# EAGLE board H04 (EAGLE 6.6.0)
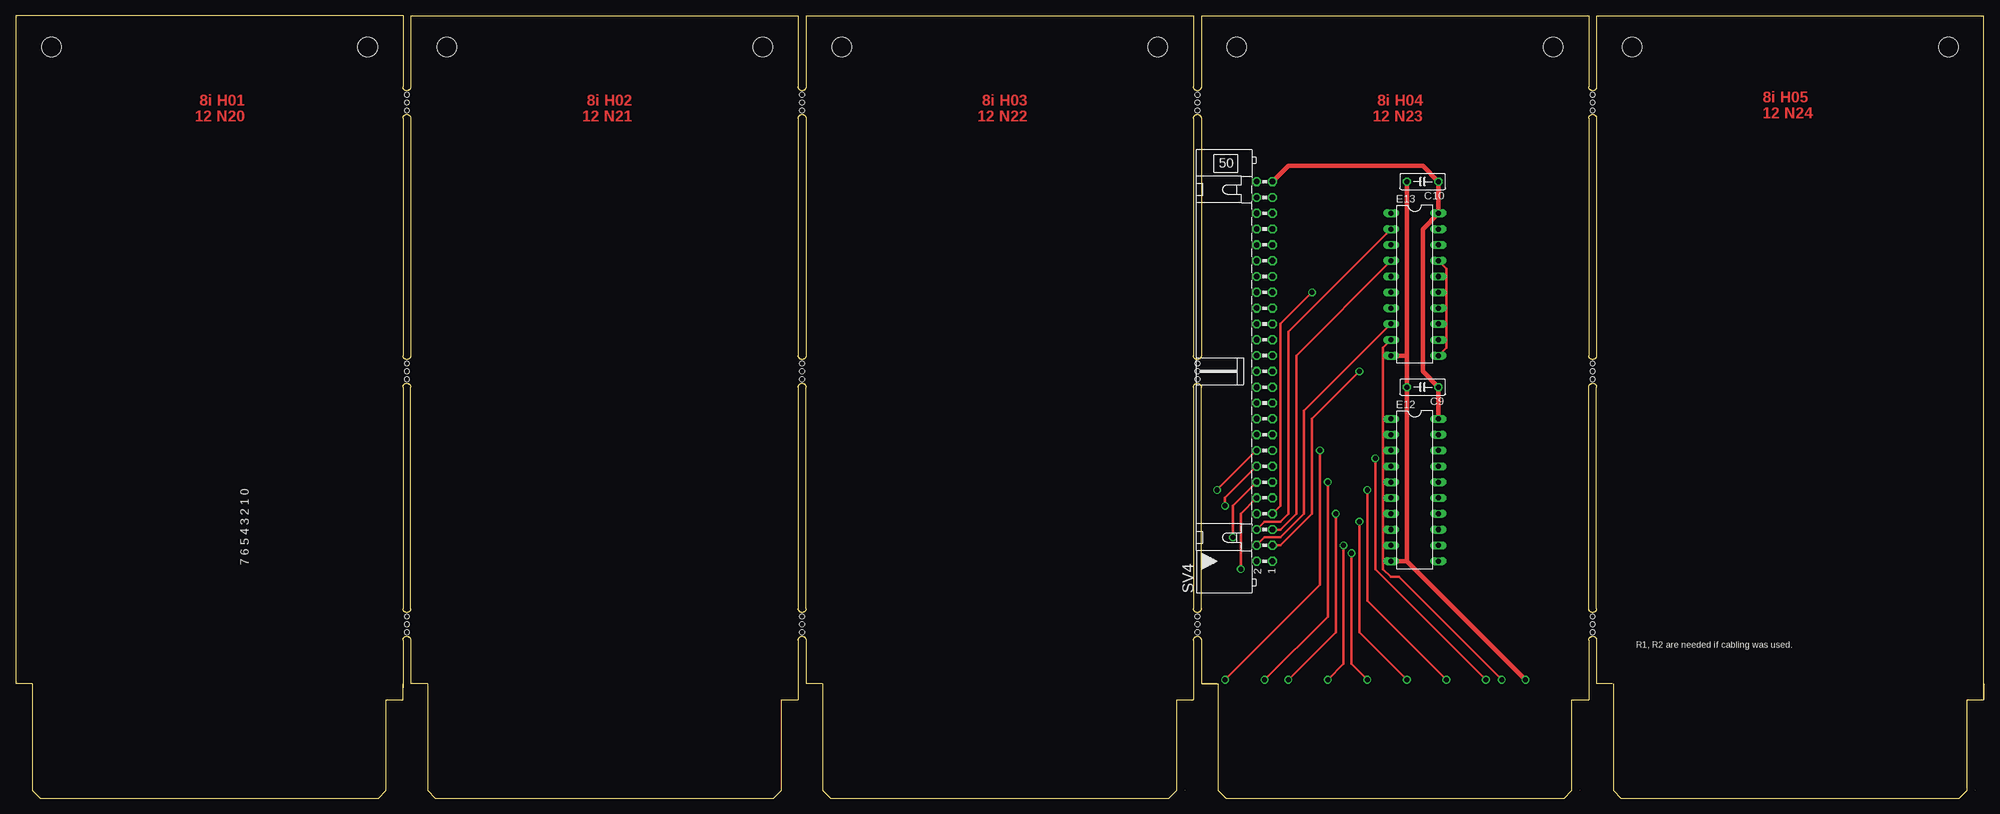
[diagram p0: board, top side]
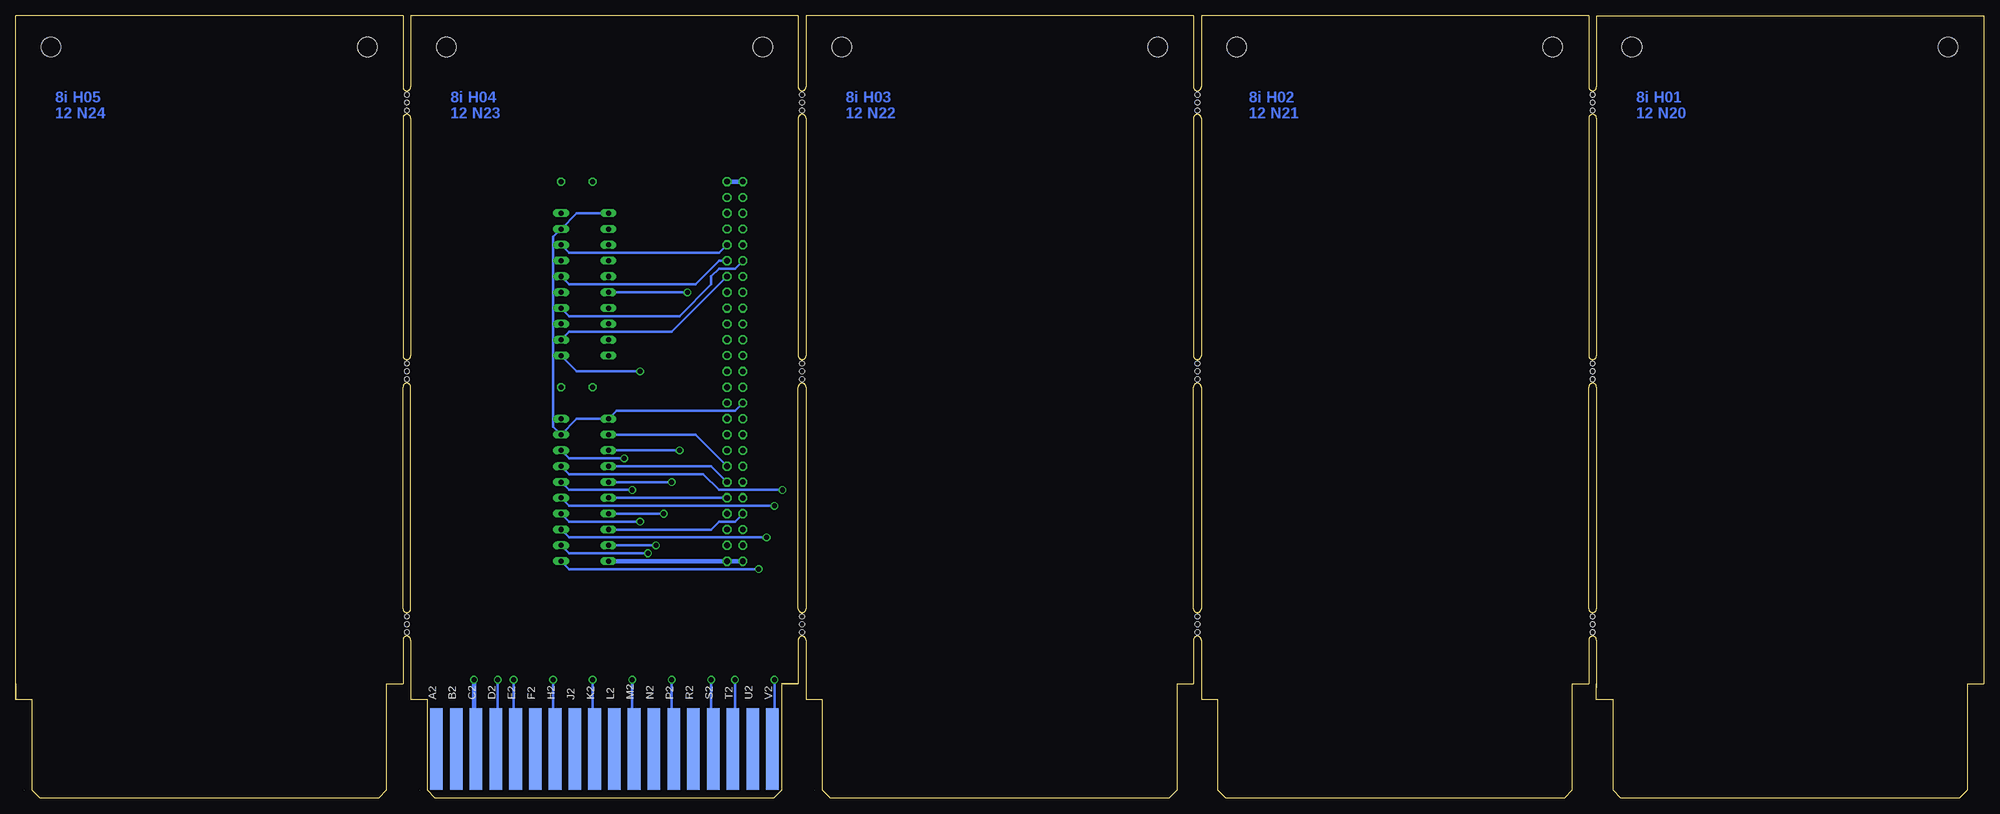
[diagram p1: board, bottom side, seen from below]

Size 316.23 x 125.73 mm. Coordinates in mm from the lower left corner, seen from the top.
Copper layers (1+16): Top 0.035mm / dielectric 1.5mm / Bottom 0.035mm
Design rules "16mils": minimum track width 16mil, minimum drill 32mil, track to track 15mil, track to pad 10mil, pad to pad 10mil, via to via 10mil, smd to smd 10mil, copper to edge 13mil, drill to drill 10mil, minimum pad ring 10mil, minimum via ring 8mil, stop-mask expansion 0mil, vias tented up to drill 0mil, thermal gap 10mil
Net classes: 1 supply: width 0.711 mm

## Footprints (pad centres in the part's own frame; a part is rotated, then mirrored left to right if it is on the bottom)
C050-025X075 = drill 0.813 octagon: 1 -2.54,0; 2 2.54,0
DIL20 = drill 0.813 long: 1 -11.43,-3.81; 2 -8.89,-3.81; 3 -6.35,-3.81; 4 -3.81,-3.81; 5 -1.27,-3.81; 6 1.27,-3.81; 7 3.81,-3.81; 8 6.35,-3.81; 9 8.89,-3.81; 10 11.43,-3.81; 11 11.43,3.81; 12 8.89,3.81; 13 6.35,3.81; 14 3.81,3.81; 15 1.27,3.81; 16 -1.27,3.81; 17 -3.81,3.81; 18 -6.35,3.81; 19 -8.89,3.81; 20 -11.43,3.81
EDGE-CON1 = smd 13.106 x 2.032 bottom: A2 7.938,4.128; B2 7.938,7.303; C2 7.938,10.477; D2 7.938,13.652; E2 7.938,16.828; F2 7.938,20.003; H2 7.938,23.177; J2 7.938,26.352; K2 7.938,29.527; L2 7.938,32.703; M2 7.938,35.877; N2 7.938,39.053; P2 7.938,42.227; R2 7.938,45.403; S2 7.938,48.578; T2 7.938,51.752; U2 7.938,54.928; V2 7.938,58.102
ML50L = drill 0.914 octagon: 1 -30.48,-1.27; 2 -30.48,1.27; 3 -27.94,-1.27; 4 -27.94,1.27; 5 -25.4,-1.27; 6 -25.4,1.27; 7 -22.86,-1.27; 8 -22.86,1.27; 9 -20.32,-1.27; 10 -20.32,1.27; 11 -17.78,-1.27; 12 -17.78,1.27; 13 -15.24,-1.27; 14 -15.24,1.27; 15 -12.7,-1.27; 16 -12.7,1.27; 17 -10.16,-1.27; 18 -10.16,1.27; 19 -7.62,-1.27; 20 -7.62,1.27; 21 -5.08,-1.27; 22 -5.08,1.27; 23 -2.54,-1.27; 24 -2.54,1.27; 25 0,-1.27; 26 0,1.27; 27 2.54,-1.27; 28 2.54,1.27; 29 5.08,-1.27; 30 5.08,1.27; 31 7.62,-1.27; 32 7.62,1.27; 33 10.16,-1.27; 34 10.16,1.27; 35 12.7,-1.27; 36 12.7,1.27; 37 15.24,-1.27; 38 15.24,1.27; 39 17.78,-1.27; 40 17.78,1.27; 41 20.32,-1.27; 42 20.32,1.27; 43 22.86,-1.27; 44 22.86,1.27; 45 25.4,-1.27; 46 25.4,1.27; 47 27.94,-1.27; 48 27.94,1.27; 49 30.48,-1.27; 50 30.48,1.27
DECPROTO11111 = hole 3.175: 183.515,120.65; 132.715,120.65; 69.266,120.65; 120.066,120.65; 56.566,120.65; 5.766,120.65; 247.015,120.65; 196.215,120.65; 310.515,120.65; 259.715,120.65 | hole 0.813: 62.865,69.85; 62.865,68.58; 62.865,67.31; 62.865,26.67; 62.865,27.94; 62.865,29.21; 62.865,113.03; 62.865,110.49; 62.865,111.76; 126.365,69.85; 126.365,68.58; 126.365,67.31; 126.365,26.67; 126.365,27.94; 126.365,29.21; 126.365,113.03; 126.365,110.49; 126.365,111.76; 189.865,26.67; 189.865,27.94; 189.865,29.21; 189.865,67.31; 189.865,68.58; 189.865,69.85; 189.865,110.49; 189.865,111.76; 189.865,113.03; 253.365,26.67; 253.365,27.94; 253.365,29.21; 253.365,67.31; 253.365,68.58; 253.365,69.85; 253.365,110.49; 253.365,111.76; 253.365,113.03

## Placement (x,y rotation side)
C9  0.1uF  [C050-025X075]  226.06,66.04 180 top
C10  0.1uF  [C050-025X075]  226.06,99.06 180 top
E12  74S244N  [DIL20]  224.79,49.53 270 top
E13  74S244N  [DIL20]  224.79,82.55 270 top
H04  [EDGE-CON1]  252.73,0 90 top
SV4  [ML50L]  200.66,68.58 90 top
U$6  DECPROTO11111  [DECPROTO11111]  0,0 0 top

## Library data of the parts
C9 C10 = rcl
E12 E13 = 74xx-us
H04 U$6 = dec-con
SV4 = con-ml; OC_FARNELL: unknown; OC_NEWARK: unknown

## Nets
D0: E12.2 SV4.13
D1: E12.4 SV4.11
D2: E12.6 SV4.9
D3: E12.8 SV4.8
D4: E12.11 SV4.10
D5: E12.13 SV4.12
D6: E12.15 SV4.14
D7: E12.17 SV4.16
D8: E13.2 SV4.6
D9: E13.4 SV4.5
D10: E13.6 SV4.7
D11: E13.8 SV4.4
GND [supply]: C9.2 C10.2 E12.10 E13.10 H04.C2 SV4.1 SV4.2
MEM00: E12.18 H04.E2
MEM01: E12.16 H04.H2
MEM02: E12.14 H04.K2
MEM03: E12.12 H04.M2
MEM04: E12.9 H04.P2
MEM05: E12.7 H04.S2
MEM06: E12.5 H04.T2
MEM07: E12.3 H04.V2
MEM08: E13.18 SV4.41
MEM09: E13.16 SV4.39
MEM10: E13.14 SV4.40
MEM11: E13.12 SV4.37
MEM_P: E13.9 H04.D2
OE(0): E12.1 E12.19 E13.1 E13.19 SV4.22
PARITY: E13.11 E13.13 E13.15 E13.17 SV4.3
VCC [supply]: C9.1 C10.1 E12.20 E13.20 SV4.49 SV4.50

## Tracks (layer width: path | path; a pad name or v marks a point on that pad's centre or on a via)
D0
  Bottom 0.406: E12.2 207.01,58.42 SV4.13
D1
  Bottom 0.406: E12.4 204.47,53.34 SV4.11
D2
  Bottom 0.406: E12.6 SV4.9
D3
  Bottom 0.406: E12.8 204.47,43.18 203.2,44.45 200.66,44.45 SV4.8
D4  (via drill 0.81)
  Top 0.406: SV4.10 196.85,45.72 v196.85,36.83
  Bottom 0.406: E12.11 227.33,36.83 v196.85,36.83
D5  (via drill 0.81)
  Top 0.406: SV4.12 195.58,46.99 v195.58,41.91
  Bottom 0.406: E12.13 227.33,41.91 v195.58,41.91
D6  (via drill 0.81)
  Top 0.406: SV4.14 194.31,48.26 v194.31,46.99
  Bottom 0.406: E12.15 227.33,46.99 v194.31,46.99
D7  (via drill 0.81)
  Top 0.406: SV4.16 v193.04,49.53
  Bottom 0.406: E12.17 227.33,52.07 205.74,52.07 203.2,49.53 v193.04,49.53
D8
  Top 0.406: SV4.6 200.66,44.45 203.2,44.45 204.47,45.72 204.47,74.93 E13.2
D9
  Top 0.406: SV4.5 203.2,43.18 205.74,45.72 205.74,71.12 E13.4
D10  (via drill 0.81)
  Top 0.406: SV4.7 203.2,46.99 203.2,76.2 v208.28,81.28
  Bottom 0.406: v208.28,81.28 E13.6
D11
  Top 0.406: SV4.4 200.66,41.91 203.2,41.91 207.01,45.72 207.01,62.23 E13.8
GND  (via drill 0.81)
  Top 0.711: 223.52,38.1 E12.10 | 223.52,38.1 C9.2 223.52,71.12 | E13.10 223.52,71.12 | C10.2 223.52,71.12 | v242.57,19.05 223.52,38.1
  Bottom 0.711: H04.C2 242.25,8.57 242.57,8.89 v242.57,19.05 | SV4.2 SV4.1 E12.10
MEM00  (via drill 0.81)
  Top 0.406: v218.44,54.61 218.44,36.83 v236.22,19.05
  Bottom 0.406: H04.E2 236.22,7.62 v236.22,19.05 | v218.44,54.61 227.33,54.61 E12.18
MEM01  (via drill 0.81)
  Top 0.406: v217.17,49.53 217.17,31.75 v229.87,19.05
  Bottom 0.406: H04.H2 229.87,7.62 v229.87,19.05 | v217.17,49.53 227.33,49.53 E12.16
MEM02  (via drill 0.81)
  Top 0.406: v215.9,44.45 215.9,26.67 v223.52,19.05
  Bottom 0.406: H04.K2 223.2,8.57 223.52,8.89 v223.52,19.05 | v215.9,44.45 227.33,44.45 E12.14
MEM03  (via drill 0.81)
  Top 0.406: v214.63,39.37 214.63,21.59 v217.17,19.05
  Bottom 0.406: H04.M2 216.85,8.57 217.17,8.89 v217.17,19.05 | v214.63,39.37 227.33,39.37 E12.12
MEM04  (via drill 0.81)
  Top 0.406: v213.36,40.64 213.36,21.59 v210.82,19.05
  Bottom 0.406: H04.P2 210.5,8.57 210.82,8.89 v210.82,19.05 | v213.36,40.64 E12.9
MEM05  (via drill 0.81)
  Top 0.406: v212.09,45.72 212.09,26.67 v204.47,19.05
  Bottom 0.406: H04.S2 204.15,8.57 204.47,8.89 v204.47,19.05 | v212.09,45.72 E12.7
MEM06  (via drill 0.81)
  Top 0.406: v210.82,50.8 210.82,29.21 v200.66,19.05
  Bottom 0.406: H04.T2 200.98,8.57 200.66,8.89 v200.66,19.05 | v210.82,50.8 E12.5
MEM07  (via drill 0.81)
  Top 0.406: v209.55,55.88 209.55,34.29 v194.31,19.05
  Bottom 0.406: v209.55,55.88 E12.3 | H04.V2 194.31,8.26 v194.31,19.05
MEM08
  Bottom 0.406: E13.18 227.33,87.63 203.2,87.63 SV4.41
MEM09
  Bottom 0.406: E13.16 227.33,82.55 207.01,82.55 203.2,86.36 SV4.39
MEM10
  Bottom 0.406: E13.14 227.33,77.47 209.55,77.47 204.47,82.55 204.47,83.82 203.2,85.09 200.66,85.09 SV4.40
MEM11
  Bottom 0.406: E13.12 227.33,74.93 210.82,74.93 SV4.37
MEM_P  (via drill 0.81)
  Top 0.406: E13.9 219.71,72.39 219.71,36.83 220.98,35.56 222.25,35.56 v238.76,19.05
  Bottom 0.406: H04.D2 239.08,9.84 238.76,10.16 v238.76,19.05
OE(0)
  Bottom 0.406: E13.1 226.06,93.98 E13.19 229.87,90.17 229.87,59.69 E12.19 226.06,60.96 E12.1 219.71,62.23 200.66,62.23 SV4.22
PARITY  (via drill 0.81)
  Top 0.406: SV4.3 203.2,40.64 208.28,45.72 208.28,60.96 v215.9,68.58 | E13.11 229.87,72.39 229.87,76.2 | 229.87,76.2 229.87,81.28 | 229.87,81.28 229.87,85.09 E13.17 | E13.15 229.87,81.28 | E13.13 229.87,76.2
  Bottom 0.406: v215.9,68.58 226.06,68.58 E13.11
VCC
  Top 0.711: E12.20 C9.1 226.06,68.58 226.06,91.44 E13.20 C10.1 226.06,101.6 204.47,101.6 SV4.49
  Bottom 0.711: SV4.50 SV4.49

## Text on the board
Top: 8i H01 | 8i H02 | 8i H03 | 8i H04 | 8i H05 | 12 N20 | 12 N21 | 12 N22 | 12 N23 | 12 N24
Bottom: 8i H01 | 8i H02 | 8i H03 | 8i H04 | 8i H05 | 12 N20 | 12 N21 | 12 N22 | 12 N23 | 12 N24
tPlace: 7 6 5 4 3 2 1 0 | R1, R2 are needed if cabling was used.
tValues: 8i H01 | 8i H02 | 8i H03 | 8i H04 | 8i H05 | 12 N20 | 12 N21 | 12 N22 | 12 N23 | 12 N24 | VCC | GND